# Altium PCB WeatherChannel.PcbDoc (part 1 of 2)
Units mil, origin at the board's own origin, x right, y up, seen from the top; angles counter-clockwise.
Board outline 4050 x 7300 mil, 2 copper layers (Top Layer, Bottom Layer); 129 components, 144 nets, 770 pads, 170 vias.
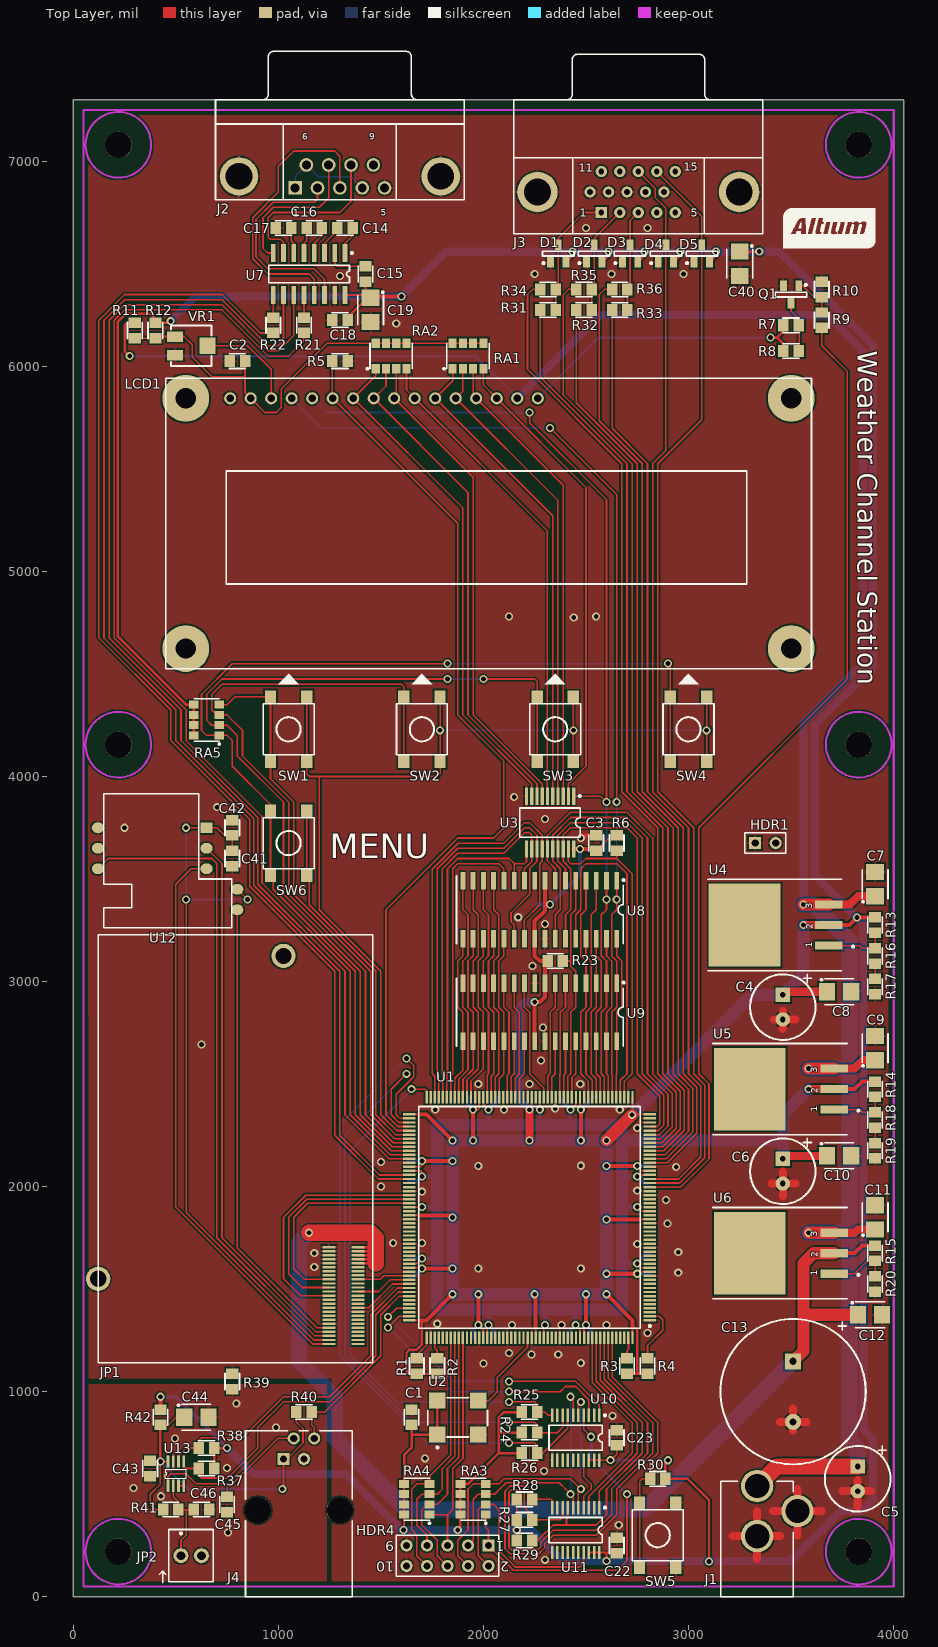
[diagram p0: Top Layer view]
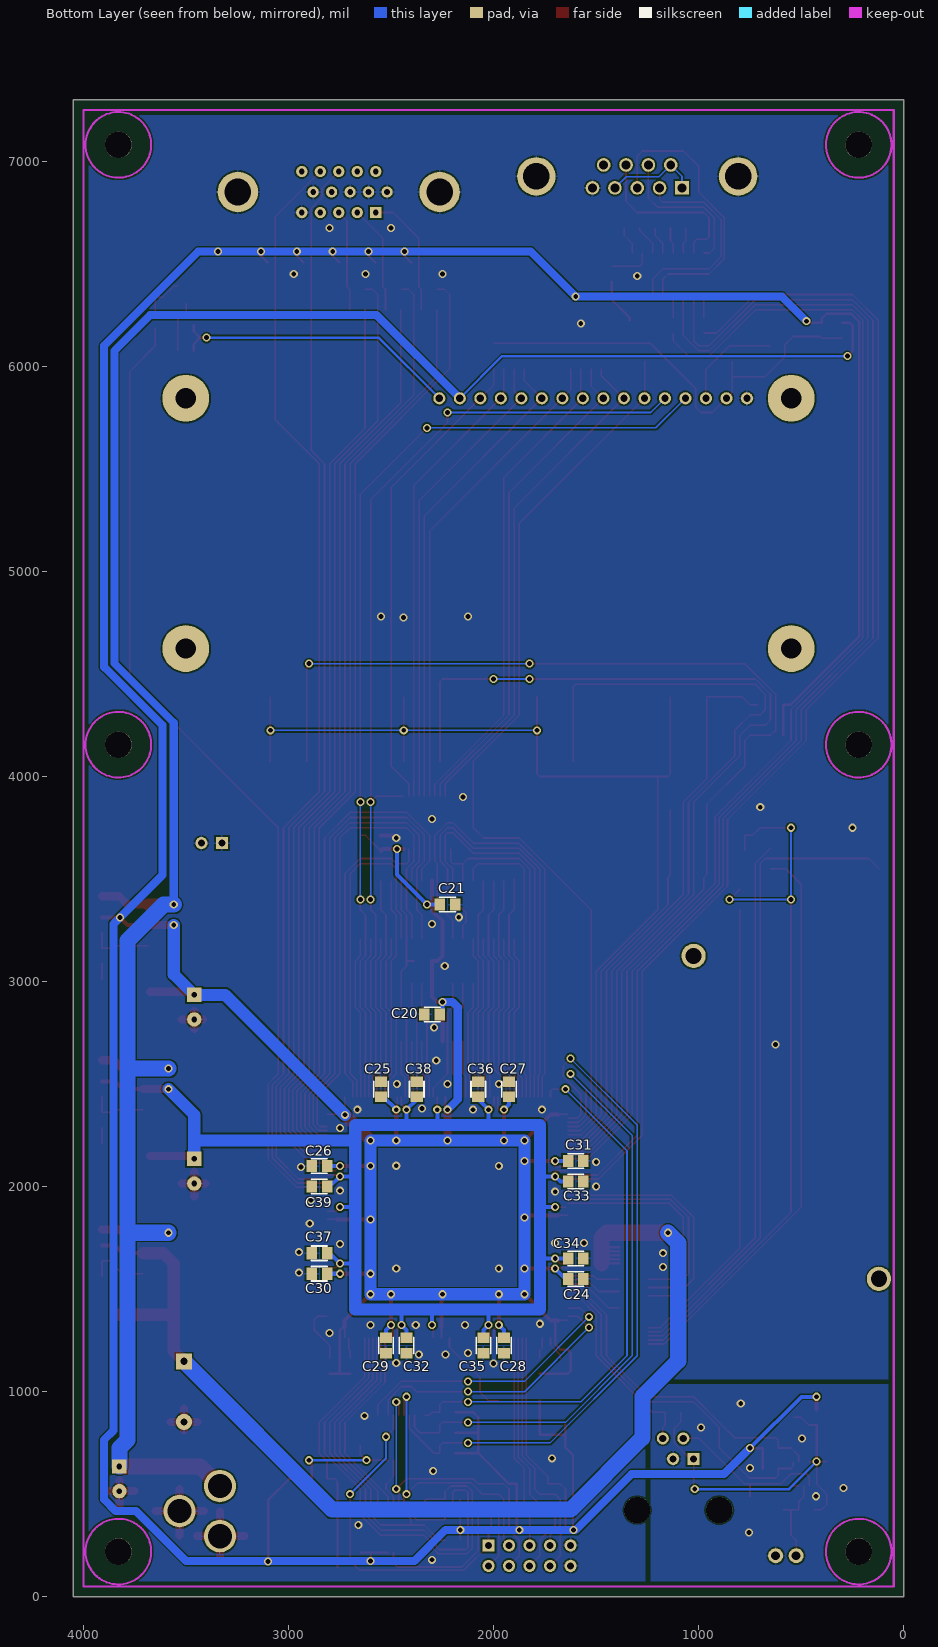
[diagram p1: Bottom Layer view, seen from below]

## Layer stack, top to bottom
Top Layer: signal copper 1.4
Dielectric: dielectric 12.6, FR-4, Dk 4.8
Bottom Layer: signal copper 1.4

## Board outline
0,0 4050,0 4050,7300 0,7300

## Design rules (kind name [scope] priority, off if disabled: settings)
Clearance [All] p1: gap=7.87
FabricationTestPointUsage TestPointUsage [All] p1: valid=0 allowmultiple=FALSE
FabricationTestpoint Testpoint [All] p1: side=3 testpointundercomponent=TRUE minsize=40 maxsize=100 preferedsize=60 minholesize=0 maxholesize=40 preferedholesize=32 testpointgrid=1 allowsidetop=TRUE allowsidebottom=TRUE usegrid=TRUE gridtolerance=0.01
HoleSize [All] p1: absolutevalues=TRUE maxlimit=157.48 minlimit=1 maxpercent=80.000 minpercent=20.000
PolygonConnect [All] p1: connectstyle=Relief reliefconductorwidth=10 reliefentries=4 polygonreliefangle="90 Angle"
RoomDefinition U_WC_MODEM [InComponentClass('U_WC_MODEM')] p1: confinementstyle=ConfineIn formatcopy=TRUE lockcomponents=FALSE outline 50,1050 1525,1050 1525,4050 50,4050
RoomDefinition FPGA_U1_Manual [InComponentClass('FPGA_U1_Manual')] p2: confinementstyle=ConfineIn formatcopy=TRUE lockcomponents=FALSE outline 1450,625 2900,625 2900,1325 1450,1325
RoomDefinition U_FPGA_U1_Auto [InComponentClass('U_FPGA_U1_Auto')] p3: confinementstyle=ConfineIn formatcopy=TRUE lockcomponents=FALSE outline 1580,1160 2860,1160 2860,2540 1580,2540
RoomDefinition U_WC_Boot [InComponentClass('U_WC_Boot')] p4: confinementstyle=ConfineIn formatcopy=TRUE lockcomponents=FALSE outline 1450,1025 1450,25 2850,25 2850,1025
RoomDefinition U_WC_KB [InComponentClass('U_WC_KB')] p5: confinementstyle=ConfineIn formatcopy=TRUE lockcomponents=FALSE outline 50,3450 3250,3450 3250,4455 50,4455
RoomDefinition U_WC_LCD [InComponentClass('U_WC_LCD')] p6: confinementstyle=ConfineIn formatcopy=TRUE lockcomponents=FALSE outline 100,3550 4100,3550 4100,6525 100,6525
RoomDefinition U_WC_PWR [InComponentClass('U_WC_PWR')] p7: confinementstyle=ConfineIn formatcopy=TRUE lockcomponents=FALSE outline 4125,-200 4125,3850 3085,3850 3085,-200
RoomDefinition U_WC_RS232 [InComponentClass('U_WC_RS232')] p8: confinementstyle=ConfineIn formatcopy=TRUE lockcomponents=FALSE outline 2025,7625 350,7625 350,6100 2025,6100
RoomDefinition U_WC_SENS [InComponentClass('U_WC_SENS')] p9: confinementstyle=ConfineIn formatcopy=TRUE lockcomponents=FALSE outline 325,-25 1425,-25 1425,1125 325,1125
RoomDefinition U_WC_SRAM [InComponentClass('U_WC_SRAM')] p10: confinementstyle=ConfineIn formatcopy=TRUE lockcomponents=FALSE outline 2850,2550 2850,3550 1750,3550 1750,2550
RoomDefinition U_WC_VGA [InComponentClass('U_WC_VGA')] p11: confinementstyle=ConfineIn formatcopy=TRUE lockcomponents=FALSE outline 3375,7575 2065,7575 2065,6150 3375,6150
RoutingVias [All] p1: holewidth=23.62 width=39.37 viastyle="Through Hole" minholewidth=23.62 minwidth=39.37 maxholewidth=23.62 maxwidth=39.37
SilkscreenOverComponentPads [All] p1: minsilkscreentomaskgap=10
SolderMaskExpansion [All] p1: expansion=4
Width Width_Power [(InNet('1V8') OR InNet('4V1') OR InNet('VCC') OR InNet('5V') OR InNet('GND'))] p1: maxlimit=98.43 minlimit=7.87 preferedwidth=7.87
Width [All] p2: maxlimit=11.81 minlimit=7.87 preferedwidth=7.87
24 further rules are at their usual default settings.

## Classes and differential pairs
component class U_WC_Boot: C22 C23 HDR4 R24 R25 R26 R27 R28 R29 RA3 RA4 U10 U11
component class U_FPGA_U1_Auto: U1
net class RED[1..0]: RED0 RED1
net class RAM_ADDR[16..0]: RAM_ADDR0 RAM_ADDR1 RAM_ADDR2 RAM_ADDR3 RAM_ADDR4 RAM_ADDR5 RAM_ADDR6 RAM_ADDR7 RAM_ADDR8 RAM_ADDR9 RAM_ADDR10 RAM_ADDR11 RAM_ADDR12 RAM_ADDR13 RAM_ADDR14 RAM_ADDR15 RAM_ADDR16
net class RAM1_DATA[7..0]: RAM1_DATA0 RAM1_DATA1 RAM1_DATA2 RAM1_DATA3 RAM1_DATA4 RAM1_DATA5 RAM1_DATA6 RAM1_DATA7
net class RAM0_DATA[7..0]: RAM0_DATA0 RAM0_DATA1 RAM0_DATA2 RAM0_DATA3 RAM0_DATA4 RAM0_DATA5 RAM0_DATA6 RAM0_DATA7
net class KP_ROW[3..0]: KP_ROW0 KP_ROW1 KP_ROW2 KP_ROW3
net class KP_COL[3..0]: KP_COL0 KP_COL1 KP_COL2 KP_COL3
net class GREEN[1..0]: GREEN0 GREEN1
net class BLUE[1..0]: BLUE0 BLUE1
component class U_WC_VGA: C40 D1 D2 D3 D4 D5 J3 R31 R32 R33 R34 R35 R36
component class U_WC_SRAM: C20 C21 R23 U8 U9
component class U_WC_SENS: C43 C44 C45 C46 J4 JP2 R37 R38 R39 R40 R41 R42 U13
component class U_WC_RS232: C14 C15 C16 C17 C18 C19 J2 R21 R22 U7
component class U_WC_PWR: C4 C5 C6 C7 C8 C9 C10 C11 C12 C13 HDR1 J1 R13 R14 R15 R16 R17 R18 R19 R20 U4 U5 U6
component class U_WC_MODEM: C41 C42 JP1 U12
component class U_WC_KB: RA5 SW1 SW2 SW3 SW4 SW6
component class FPGA_U1_Manual: C1 R1 R2 R3 R4 U2
component class U_WC_LCD: C2 C3 LCD1 Q1 R5 R6 R7 R8 R9 R10 R11 R12 RA1 RA2 U3 VR1

## Components (designator, comment, footprint, x,y, rotation, side; value= is the part's Value field where it differs from the comment)
C1 "0.1uF" CC2012-0805 1650,875 r90 top
C2 "0.1uF" CC2012-0805 800,6025 r180 top
C3 "0.1uF" CC2012-0805 2550,3675 r90 top
C4 "470uF 16V" RB8/3.5 3460,2875 r0 top
C5 "470uF 16V" RB8/3.5 3825,575 r0 top
C6 "470uF 16V" RB8/3.5 3460,2075 r0 top
C7 "10uF" MCCT-B 3910,3475 r90 top
C8 "10uF" MCCT-B 3735,2950 r0 top
C9 "10uF" MCCT-B 3910,2675 r90 top
C10 "10uF" MCCT-B 3735,2150 r0 top
C11 "10uF" MCCT-B 3910,1850 r90 top
C12 "10uF" MCCT-B 3885,1375 r0 top
C13 "10000uF 16V" RB18/7.5 3510,1000 r0 top
C14 "0.1uF" CC2012-0805 1325,6675 r180 top
C15 "0.1uF" CC2012-0805 1425,6450 r90 top
C16 "0.1uF" CC2012-0805 1175,6675 r180 top
C17 "0.1uF" CC2012-0805 1025,6675 r180 top
C18 "0.1uF" CC2012-0805 1300,6225 r180 top
C19 "10uF" MCCT-B 1450,6275 r270 top
C20 "0.1uF" CC2012-0805 2300,2840 r0 bottom
C21 "0.1uF" CC2012-0805 2225,3375 r180 bottom
C22 "0.1uF" CC2012-0805 2650,250 r270 top
C23 "0.1uF" CC2012-0805 2650,775 r270 top
C24 "0.1uF" CC2012-0805 1600,1550 r180 bottom
C25 "0.1uF" CC2012-0805 2550,2475 r90 bottom
C26 "0.1uF" CC2012-0805 2850,2100 r0 bottom
C27 "0.1uF" CC2012-0805 1925,2475 r90 bottom
C28 "0.1uF" CC2012-0805 1950,1225 r270 bottom
C29 "0.1uF" CC2012-0805 2525,1225 r270 bottom
C30 "0.1uF" CC2012-0805 2850,1575 r0 bottom
C31 "0.1uF" CC2012-0805 1600,2125 r180 bottom
C32 "0.1uF" CC2012-0805 2425,1225 r270 bottom
C33 "0.1uF" CC2012-0805 1600,2025 r180 bottom
C34 "0.1uF" CC2012-0805 1600,1650 r180 bottom
C35 "0.1uF" CC2012-0805 2050,1225 r270 bottom
C36 "0.1uF" CC2012-0805 2075,2475 r90 bottom
C37 "0.1uF" CC2012-0805 2850,1675 r0 bottom
C38 "0.1uF" CC2012-0805 2375,2475 r90 bottom
C39 "0.1uF" CC2012-0805 2850,2000 r0 bottom
C40 "10uF" MCCT-B 3250,6500 r270 top
C41 "0.1uF" CC2012-0805 775,3600 r270 top
C42 "0.1uF" CC2012-0805 775,3750 r90 top
C43 "0.1uF" CC2012-0805 375,625 r270 top
C44 "10uF" MCCT-B 600,875 r0 top
C45 "100pF" CC2012-0805 750,450 r270 top
C46 "100pF" CC2012-0805 625,425 r0 top
D1 "BAS40-04" SO-G3 2365,6550 r0 top
D2 "BAS40-04" SO-G3 2540,6550 r0 top
D3 "BAS40-04" SO-G3 2715,6550 r0 top
D4 "BAS40-04" SO-G3 2890,6550 r0 top
D5 "BAS40-04" SO-G3 3065,6550 r0 top
HDR1 "Header 2" HDR1X2 3325,3675 r0 top
HDR4 "Header 5X2" HDR2X5 2025,250 r180 top
J1 "PWR2.5" PWR2.5 3335,0 r90 top
J2 "DB9 Female" DSUB1.385-2H9 1300,7300 r0 top
J3 "Dsub-15-Female-HD" DB15-VGA-Female 2575,6750 r0 top
J4 "95009-2641" JACK1.27-2H4D 1100,0 r0 top
JP1 "Header 25X2" MC45 1025,3125 r180 top
JP2 "MHDR1X2" TS2.54x2 525,200 r90 top
LCD1 "162A" 162A 450,4525 r0 top
Q1 "2N7002" SO-G3 3500,6350 r180 top
R1 "4K7" CC2012-0805 1675,1125 r90 top
R2 "4K7" CC2012-0805 1775,1125 r90 top
R3 "4K7" CC2012-0805 2700,1125 r90 top
R4 "4K7" CC2012-0805 2800,1125 r90 top
R5 "4K7" CC2012-0805 1300,6025 r0 top
R6 "1K" CC2012-0805 2650,3675 r90 top
R7 "68R" CC2012-0805 3500,6200 r0 top
R8 "68R" CC2012-0805 3500,6075 r0 top
R9 "560R" CC2012-0805 3650,6225 r90 top
R10 "10K" CC2012-0805 3650,6375 r270 top
R11 "0R" CC2012-0805 300,6175 r270 top
R12 "0R" CC2012-0805 400,6175 r270 top
R13 "120R" CC2012-0805 3910,3275 r270 top
R14 "120R" CC2012-0805 3910,2475 r270 top
R15 "120R" CC2012-0805 3910,1675 r270 top
R16 "100R" CC2012-0805 3910,3125 r270 top
R17 "100R" CC2012-0805 3910,2975 r270 top
R18 "47R" CC2012-0805 3910,2325 r270 top
R19 "5R6" CC2012-0805 3910,2175 r270 top
R20 "270R" CC2012-0805 3910,1525 r270 top
R21 "100R" CC2012-0805 1125,6200 r90 top
R22 "100R" CC2012-0805 975,6200 r90 top
R23 "4K7" CC2012-0805 2350,3100 r0 top
R24 "4K7" CC2012-0805 2225,800 r0 top
R25 "4K7" CC2012-0805 2225,900 r0 top
R26 "4K7" CC2012-0805 2225,700 r0 top
R27 "4K7" CC2012-0805 2200,375 r0 top
R28 "4K7" CC2012-0805 2200,475 r0 top
R29 "4K7" CC2012-0805 2200,275 r0 top
R30 "4K7" CC2012-0805 2850,575 r180 top
R31 "680R" CC2012-0805 2315,6275 r0 top
R32 "680R" CC2012-0805 2490,6275 r0 top
R33 "680R" CC2012-0805 2665,6275 r0 top
R34 "330R" CC2012-0805 2315,6375 r0 top
R35 "330R" CC2012-0805 2490,6375 r0 top
R36 "330R" CC2012-0805 2665,6375 r0 top
R37 "4K7" CC2012-0805 650,625 r180 top
R38 "4K7" CC2012-0805 650,725 r180 top
R39 "0R" CC2012-0805 775,1050 r270 top
R40 "2K7" CC2012-0805 1125,900 r0 top
R41 "2K7" CC2012-0805 475,425 r0 top
R42 "4R7" CC2012-0805 425,875 r270 top
RA1 "4K7" MNR34 1925,6050 r90 top
RA2 "4K7" MNR34 1550,6050 r90 top
RA3 "4K7" MNR34 1950,475 r180 top
RA4 "4K7" MNR34 1675,475 r180 top
RA5 "4K7" MNR34 650,4275 r180 top
SW1 "B3FS" B3FS_SWITCH 1050,4230 r90 top
SW2 "B3FS" B3FS_SWITCH 1700,4230 r90 top
SW3 "B3FS" B3FS_SWITCH 2350,4230 r90 top
SW4 "B3FS" B3FS_SWITCH 3000,4230 r90 top
SW5 "B3FS" B3FS_SWITCH 2850,300 r270 top
SW6 "B3FS" B3FS_SWITCH 1050,3675 r90 top
U1 "XC2S300E-6PQ208C" PQ208 2225,1850 r180 top
U2 "QSMO_4200" QSMO_4200 1775,775 r0 top
U3 "74LVC245A" SSO-G20/P.65 2325,3775 r180 top
U4 "LM1084IS-ADJ" TO-263 3685,3175 r90 top
U5 "LM1084IS-ADJ" TO-263 3710,2375 r90 top
U6 "LM1084IS-ADJ" TO-263 3710,1575 r90 top
U7 "MAX3232EUE" SO-G16 1150,6450 r180 top
U8 "IDT71V124SA15Y" SO-J32 2275,3350 r180 top
U9 "IDT71V124SA15Y" SO-J32 2275,2850 r180 top
U10 "XCF01SVO20C" VO20 2450,775 r180 top
U11 "XCF01SVO20C" VO20 2450,325 r180 top
U12 "CCM03_CARD_SOCKET" CCM03_MKIII 650,3750 r0 top
U13 "MAX1037" SOT23_8 500,600 r90 top
VR1 "20K" POT4MM-2 575,6100 r0 top
? "" AltiumLogo48mm 3457.86,6575 r0 top

## Footprints (in the part's own frame and the unit in brackets; to place one, negate y for a bottom-side part, rotate by r counter-clockwise, add the part's x,y. Pads: shape width x height; smd on the part's side, far side on the other; paste and mask are expansions set on the pad)
162A [mm]
  round 1.5 hole 0.9: 1(8.001,33.503) 2(10.541,33.503) 3(13.081,33.503) 4(15.621,33.503) 5(18.161,33.503) 6(20.701,33.503) 7(23.241,33.503) 8(25.781,33.503) 9(28.321,33.503) 10(30.861,33.503) 11(33.401,33.503) 12(35.941,33.503) 13(38.481,33.503) 14(41.021,33.503) 15(43.561,33.503) 16(46.101,33.503)
  round 5.8 hole 2.5 unplated: M1(2.501,33.503) M2(77.501,33.503) M3(2.501,2.503) M4(77.501,2.503)
  silkscreen extent 0,0 80,36
AltiumLogo48mm [mil]
  silkscreen extent 4,4 452,196
B3FS_SWITCH [mm]
  rect 1.6x1.4 smd: 1(4.01,-2.25) 2(-4,-2.25) 3(4.01,2.24) 4(-4,2.24)
  silkscreen extent -3.16,-3.16 3.15,3.15
CC2012-0805 [mm]
  rect 1.3x1.5 smd: 1(-0.95,0) 2(0.95,0)
  silkscreen extent -1,-0.9 1,0.9
CCM03_MKIII [mm] "SIM/SAM card connector with card detection switch"
  rect 1.5x1.3 smd: 1(0,0)
  oval 1.5x1.3 smd: 2(0,-2.54) 3(0,-5.08) 4(-13.45,0) 5(-13.45,-2.54) 6(-13.45,-5.08) 7(3.8,-7.62) 8(3.8,-10.16)
  silkscreen extent -12.75,-12.4 3.1,4.2
DB15-VGA-Female [mm]
  rect 1.4x1.4 hole 0.7: 1(0,0)
  round 1.4 hole 0.7: 2(2.29,0) 3(4.58,0) 4(6.87,0) 5(9.16,0) 6(-1.4,2.54) 7(0.89,2.54) 8(3.18,2.54) 9(5.47,2.54) 10(7.76,2.54) 11(0,5.08) 12(2.29,5.08) 13(4.58,5.08) 14(6.87,5.08) 15(9.16,5.08)
  round 5 hole 3.3: 16(-7.915,2.54) 17(17.075,2.54)
  silkscreen extent -10.83,-2.65 20.01,19.61
DSUB1.385-2H9 [mm]
  rect 1.69x1.69 hole 1.1: 1(-5.54,-10.92)
  round 1.69 hole 1.1: 2(-2.77,-10.92) 3(0,-10.92) 4(2.77,-10.92) 5(5.54,-10.92) 6(-4.155,-8.08) 7(-1.385,-8.08) 8(1.385,-8.08) 9(4.155,-8.08)
  round 4.76 hole 3.3: 10(-12.495,-9.5) 11(12.495,-9.5)
  silkscreen extent -15.4,-12.4 15.4,6
HDR1X2 [mm]
  rect 1.5x1.5 hole 0.9: 1(0,0)
  round 1.5 hole 0.9: 2(2.54,0)
  silkscreen extent -1.27,-1.27 3.81,1.27
HDR2X5 [mm]
  rect 1.5x1.5 hole 0.9: 1(0,0)
  round 1.5 hole 0.9: 2(0,2.54) 3(2.54,0) 4(2.54,2.54) 5(5.08,0) 6(5.08,2.54) 7(7.62,0) 8(7.62,2.54) 9(10.16,0) 10(10.16,2.54)
  silkscreen extent -1.27,-1.27 11.43,3.81
JACK1.27-2H4D [mm] "Connector; PCB Jack, Thru-Hole; 1-Port, 6 Positions, 4 Loaded; Unshielded without Lightpipes; Right Angle"
  rect 1.5x1.5 hole 0.9: 1(-1.905,17.07)
  round 1.5 hole 0.9: 2(-0.635,19.61) 3(0.635,17.07) 4(1.905,19.61)
  round 3.25 hole 3.25: MH1(-5.08,10.72) MH2(5.08,10.72)
  silkscreen extent -6.6,0 6.61,20.57
MC45 [mm]
  round 3 hole 2: 0(0,0) 0(22.95,40)
  rect 1.6x0.3 smd: 1(-5.625,48.075) 2(-5.625,47.575) 3(-5.625,47.075) 4(-5.625,46.575) 5(-5.625,46.075) 6(-5.625,45.575) 7(-5.625,45.075) 8(-5.625,44.575) 9(-5.625,44.075) 10(-5.625,43.575) 11(-5.625,43.075) 12(-5.625,42.575) 13(-5.625,42.075) 14(-5.625,41.575) 15(-5.625,41.075) 16(-5.625,40.575) 17(-5.625,40.075) 18(-5.625,39.575) 19(-5.625,39.075) 20(-5.625,38.575) 21(-5.625,38.075) 22(-5.625,37.575) 23(-5.625,37.075) 24(-5.625,36.575) 25(-5.625,36.075) 26(-9.225,36.075) 27(-9.225,36.575) 28(-9.225,37.075) 29(-9.225,37.575) 30(-9.225,38.075) 31(-9.225,38.575) 32(-9.225,39.075) 33(-9.225,39.575) 34(-9.225,40.075) 35(-9.225,40.575) 36(-9.225,41.075) 37(-9.225,41.575) 38(-9.225,42.075) 39(-9.225,42.575) 40(-9.225,43.075) 41(-9.225,43.575) 42(-9.225,44.075) 43(-9.225,44.575) 44(-9.225,45.075) 45(-9.225,45.575) 46(-9.225,46.075) 47(-9.225,46.575) 48(-9.225,47.075) 49(-9.225,47.575) 50(-9.225,48.075)
  silkscreen extent -11.05,-2.62 22.95,50.4
MCCT-B [mm]
  rect 2x2.2 smd: 1(-1.5,0) 2(1.5,0)
  silkscreen extent -2.3,-1.6 1.8,1.6
MNR34 [mm]
  rect 1.2x1 smd: 1(-1.575,1.905) 2(-1.575,0.635) 3(-1.575,-0.635) 4(-1.575,-1.905) 5(1.575,-1.905) 6(1.575,-0.635) 7(1.575,0.635) 8(1.575,1.905)
  silkscreen extent -1.67,-2.62 1.55,3.07
POT4MM-2 [mm]
  rect 2x1.3 smd: CCW(-2,-1.15) CW(-2,1.15)
  rect 2x2 smd: W(2,0)
  silkscreen extent -2.5,-2.5 2.5,2.5
PQ208 [mm] "208-Pin Plastic Quad Flat Pack (PQ208)"
  rect 1.55x0.3 smd: 1(-14.9,12.75) 2(-14.9,12.25) 3(-14.9,11.75) 4(-14.9,11.25) 5(-14.9,10.75) 6(-14.9,10.25) 7(-14.9,9.75) 8(-14.9,9.25) 9(-14.9,8.75) 10(-14.9,8.25) 11(-14.9,7.75) 12(-14.9,7.25) 13(-14.9,6.75) 14(-14.9,6.25) 15(-14.9,5.75) 16(-14.9,5.25) 17(-14.9,4.75) 18(-14.9,4.25) 19(-14.9,3.75) 20(-14.9,3.25) 21(-14.9,2.75) 22(-14.9,2.25) 23(-14.9,1.75) 24(-14.9,1.25) 25(-14.9,0.75) 26(-14.9,0.25) 27(-14.9,-0.25) 28(-14.9,-0.75) 29(-14.9,-1.25) 30(-14.9,-1.75) 31(-14.9,-2.25) 32(-14.9,-2.75) 33(-14.9,-3.25) 34(-14.9,-3.75) 35(-14.9,-4.25) 36(-14.9,-4.75) 37(-14.9,-5.25) 38(-14.9,-5.75) 39(-14.9,-6.25) 40(-14.9,-6.75) 41(-14.9,-7.25) 42(-14.9,-7.75) 43(-14.9,-8.25) 44(-14.9,-8.75) 45(-14.9,-9.25) 46(-14.9,-9.75) 47(-14.9,-10.25) 48(-14.9,-10.75) 49(-14.9,-11.25) 50(-14.9,-11.75) 51(-14.9,-12.25) 52(-14.9,-12.75) 105(14.9,-12.75) 106(14.9,-12.25) 107(14.9,-11.75) 108(14.9,-11.25) 109(14.9,-10.75) 110(14.9,-10.25) 111(14.9,-9.75) 112(14.9,-9.25) 113(14.9,-8.75) 114(14.9,-8.25) 115(14.9,-7.75) 116(14.9,-7.25) 117(14.9,-6.75) 118(14.9,-6.25) 119(14.9,-5.75) 120(14.9,-5.25) 121(14.9,-4.75) 122(14.9,-4.25) 123(14.9,-3.75) 124(14.9,-3.25) 125(14.9,-2.75) 126(14.9,-2.25) 127(14.9,-1.75) 128(14.9,-1.25) 129(14.9,-0.75) 130(14.9,-0.25) 131(14.9,0.25) 132(14.9,0.75) 133(14.9,1.25) 134(14.9,1.75) 135(14.9,2.25) 136(14.9,2.75) 137(14.9,3.25) 138(14.9,3.75) 139(14.9,4.25) 140(14.9,4.75) 141(14.9,5.25) 142(14.9,5.75) 143(14.9,6.25) 144(14.9,6.75) 145(14.9,7.25) 146(14.9,7.75) 147(14.9,8.25) 148(14.9,8.75) 149(14.9,9.25) 150(14.9,9.75) 151(14.9,10.25) 152(14.9,10.75) 153(14.9,11.25) 154(14.9,11.75) 155(14.9,12.25) 156(14.9,12.75)
  rect 0.3x1.55 smd: 53(-12.75,-14.9) 54(-12.25,-14.9) 55(-11.75,-14.9) 56(-11.25,-14.9) 57(-10.75,-14.9) 58(-10.25,-14.9) 59(-9.75,-14.9) 60(-9.25,-14.9) 61(-8.75,-14.9) 62(-8.25,-14.9) 63(-7.75,-14.9) 64(-7.25,-14.9) 65(-6.75,-14.9) 66(-6.25,-14.9) 67(-5.75,-14.9) 68(-5.25,-14.9) 69(-4.75,-14.9) 70(-4.25,-14.9) 71(-3.75,-14.9) 72(-3.25,-14.9) 73(-2.75,-14.9) 74(-2.25,-14.9) 75(-1.75,-14.9) 76(-1.25,-14.9) 77(-0.75,-14.9) 78(-0.25,-14.9) 79(0.25,-14.9) 80(0.75,-14.9) 81(1.25,-14.9) 82(1.75,-14.9) 83(2.25,-14.9) 84(2.75,-14.9) 85(3.25,-14.9) 86(3.75,-14.9) 87(4.25,-14.9) 88(4.75,-14.9) 89(5.25,-14.9) 90(5.75,-14.9) 91(6.25,-14.9) 92(6.75,-14.9) 93(7.25,-14.9) 94(7.75,-14.9) 95(8.25,-14.9) 96(8.75,-14.9) 97(9.25,-14.9) 98(9.75,-14.9) 99(10.25,-14.9) 100(10.75,-14.9) 101(11.25,-14.9) 102(11.75,-14.9) 103(12.25,-14.9) 104(12.75,-14.9) 157(12.75,14.9) 158(12.25,14.9) 159(11.75,14.9) 160(11.25,14.9) 161(10.75,14.9) 162(10.25,14.9) 163(9.75,14.9) 164(9.25,14.9) 165(8.75,14.9) 166(8.25,14.9) 167(7.75,14.9) 168(7.25,14.9) 169(6.75,14.9) 170(6.25,14.9) 171(5.75,14.9) 172(5.25,14.9) 173(4.75,14.9) 174(4.25,14.9) 175(3.75,14.9) 176(3.25,14.9) 177(2.75,14.9) 178(2.25,14.9) 179(1.75,14.9) 180(1.25,14.9) 181(0.75,14.9) 182(0.25,14.9) 183(-0.25,14.9) 184(-0.75,14.9) 185(-1.25,14.9) 186(-1.75,14.9) 187(-2.25,14.9) 188(-2.75,14.9) 189(-3.25,14.9) 190(-3.75,14.9) 191(-4.25,14.9) 192(-4.75,14.9) 193(-5.25,14.9) 194(-5.75,14.9) 195(-6.25,14.9) 196(-6.75,14.9) 197(-7.25,14.9) 198(-7.75,14.9) 199(-8.25,14.9) 200(-8.75,14.9) 201(-9.25,14.9) 202(-9.75,14.9) 203(-10.25,14.9) 204(-10.75,14.9) 205(-11.25,14.9) 206(-11.75,14.9) 207(-12.25,14.9) 208(-12.75,14.9)
  silkscreen extent -15.03,-13.72 13.72,13.72
PWR2.5 [mm]
  round 4 hole 3: 1(13.7,0) 2(10.6,-5) 3(7.5,0)
  silkscreen extent 0,-4.48 14.3,4.5
QSMO_4200 [mm]
  rect 2x2 smd: 1(0,0.4) 2(5.08,0.4) 3(5.08,4.6) 4(0,4.6)
  silkscreen extent -1.19,-1.31 6.22,4.95
RB8/3.5 [mil]
  rect 70x70 hole 27.56: 1(0,60)
  round 70 hole 27.56: 2(0,-60)
  silkscreen extent -160,-160 160,160
RB18/7.5 [mm]
  rect 2x2 hole 0.9: 1(0,3.75)
  round 2 hole 0.9: 2(0,-3.75)
  silkscreen extent -9,-9 9,9
SO-G3 [mm]
  rect 0.85x1.3 smd: 1(-0.95,-1.1) 2(0.95,-1.1) 3(0,1.1)
  silkscreen extent -1.95,-1.32 1.95,0.3
SO-G16 [mm]
  rect 0.6x2.2 smd: 1(-4.445,-2.6) 2(-3.175,-2.6) 3(-1.905,-2.6) 4(-0.635,-2.6) 5(0.635,-2.6) 6(1.905,-2.6) 7(3.175,-2.6) 8(4.445,-2.6) 9(4.445,2.6) 10(3.175,2.6) 11(1.905,2.6) 12(0.635,2.6) 13(-0.635,2.6) 14(-1.905,2.6) 15(-3.175,2.6) 16(-4.445,2.6)
  silkscreen extent -5.42,-2.72 5,1.1
SO-J32 [mm]
  rect 0.6x2.2 smd: 1(-9.525,-3.6) 2(-8.255,-3.6) 3(-6.985,-3.6) 4(-5.715,-3.6) 5(-4.445,-3.6) 6(-3.175,-3.6) 7(-1.905,-3.6) 8(-0.635,-3.6) 9(0.635,-3.6) 10(1.905,-3.6) 11(3.175,-3.6) 12(4.445,-3.6) 13(5.715,-3.6) 14(6.985,-3.6) 15(8.255,-3.6) 16(9.525,-3.6) 17(9.525,3.6) 18(8.255,3.6) 19(6.985,3.6) 20(5.715,3.6) 21(4.445,3.6) 22(3.175,3.6) 23(1.905,3.6) 24(0.635,3.6) 25(-0.635,3.6) 26(-1.905,3.6) 27(-3.175,3.6) 28(-4.445,3.6) 29(-5.715,3.6) 30(-6.985,3.6) 31(-8.255,3.6) 32(-9.525,3.6)
  silkscreen extent -10.5,-4.19 10.32,4.19
SOT23_8 [mm]
  rect 1.5x0.35 smd: 1(-1.5,0.975) 2(-1.5,0.325) 3(-1.5,-0.325) 4(-1.5,-0.975) 5(1.5,-0.975) 6(1.5,-0.325) 7(1.5,0.325) 8(1.5,0.975)
  silkscreen extent -0.55,-1.3 0.55,1.3
SSO-G20/P.65 [mm]
  rect 0.4x2.15 smd: 1(-2.925,-3.275) 2(-2.275,-3.275) 3(-1.625,-3.275) 4(-0.975,-3.275) 5(-0.325,-3.275) 6(0.325,-3.275) 7(0.975,-3.275) 8(1.625,-3.275) 9(2.275,-3.275) 10(2.925,-3.275) 11(2.925,3.275) 12(2.275,3.275) 13(1.625,3.275) 14(0.975,3.275) 15(0.325,3.275) 16(-0.325,3.275) 17(-0.975,3.275) 18(-1.625,3.275) 19(-2.275,3.275) 20(-2.925,3.275)
  silkscreen extent -3.8,-3.4 3.75,1.8
TO-263 [mm]
  rect 1x3.4 smd: 1(0,0) 2(2.54,0) 3(5.08,0)
  rect 10.25x8.9 smd: 4(2.54,10.45)
  silkscreen extent -3.1,-3.13 8.2,15
TS2.54x2 [mm]
  round 1.85 hole 1.1: 1(0,0) 2(0,-2.54)
  silkscreen extent -3.35,-4 3.25,2.65
VO20 [mm]
  rect 0.3x1.65 smd: 1(-2.925,-2.775) 2(-2.275,-2.775) 3(-1.625,-2.775) 4(-0.975,-2.775) 5(-0.325,-2.775) 6(0.325,-2.775) 7(0.975,-2.775) 8(1.625,-2.775) 9(2.275,-2.775) 10(2.925,-2.775) 11(2.925,2.775) 12(2.275,2.775) 13(1.625,2.775) 14(0.975,2.775) 15(0.325,2.775) 16(-0.325,2.775) 17(-0.975,2.775) 18(-1.625,2.775) 19(-2.275,2.775) 20(-2.925,2.775)
  silkscreen extent -3.75,-2.9 3.3,1.55

## Part data
C1 C2 C3 C14 C15 C16 C17 C18 C20 C21 C22 C23 C24 C25 C26 C27 C28 C29 C30 C31 C32 C33 C34 C35 C36 C37 C38 C39 C41 C42 C43 C45 C46: library part CAP, "Capacitor"
C4 C5 C6 C7 C8 C9 C10 C11 C12 C13 C19 C40 C44: library part CAP_POLAR, "Polar Capacitor"
D1 D2 D3 D4 D5: "Shottky Diode Pair"
HDR1 JP2: "Header, 2-Pin"
HDR4: "Header, 5-Pin, Dual row"
J1: "Low Voltage Power Supply Sonnector"
J2: library part "D Connector 9", "Receptacle Assembly, 9 Position, Right Angle"
J3: "Dsub-15 High density VGA Female connetor"
J4: "Right Angle, Standard Profile, with Mounting Rib, Flush Mount PCB Jack"
JP1: "Header, 25-Pin, Dual row"
LCD1: "16 char * 2 line LCD character display with b/light"
Q1: "N Channel Mosfet"
R1 R2 R3 R4 R5 R6 R7 R8 R9 R10 R11 R12 R13 R14 R15 R16 R17 R18 R19 R20 R21 R22 R23 R24 R25 R26 R27 R28 R29 R30 R31 R32 R33 R34 R35 R36 R37 R38 R39 R40 R41 R42: library part RES, "Resistor"
RA1 RA2 RA3 RA4 RA5: library part MNR34, "3216x4 Resistor Array"
SW1 SW2 SW3 SW4 SW5 SW6: "SPNA SMD Keyboard Switch"
U1: "Spartan-IIE 1.8V FPGA, 208-Pin PQFP, Standard Performance, Commercial Grade"
U2: "Surface Mount Crystal Oscillator"
U3: "Octal Bus Transceiver with 3-State Outputs"
U4 U5 U6: "5A Low Dropout Possitive Regulators"
U7: "3.0V TO 5.5V, Low-Power, up to 1Mbps, True RS-232 Transceiver Using Four 0.1µF External Capacitor"
U8 U9: "128K x 8 bit Fast Static RAM"
U10 U11: "XCF00S Series, Platform Flash In-System Programmable Configuration 3.3V PROM, 1-Megabit, Commercial Grade"
U12: "SIM/SAM card connector with card detection switch"
U13: "4 Channel 8 Bit ADC, I2C interface, 2.7V to 3.6V Supply"
VR1: library part POT_M, "Potentiometer"

## Free pads (board coordinates)
  round 129.92 hole 129.92: MH1(3830,220) MH2(3830,4155) MH3(3830,7080) MH4(220,7080) MH5(220,4155) MH6(220,220)

## Via types
v1: diameter 39.37, hole 23.62, Top Layer to Bottom Layer, 170 vias

## Nets (pads, with @x,y where several pads share a name; then routed paths per layer and width w, separated by ;. In a path a pad name is that pad's centre, name@x,y a point inside that pad or via, vN(x,y) a via of type N, cw(c..) or ccw(c..) an arc to the next point about the centre after c; other vN are vias at no path point)
1V8: C6.1 C10.1 C32.1 C33.1 C34.1 C35.1 C36.1 C37.1 C38.1 C39.1 R14.1 U1.14 U1.28 U1.37 U1.67 U1.76 U1.90 U1.119 U1.128 U1.142 U1.172 U1.186 U1.195 U5.2 | length 7674.6
  Top Layer w7.87: U1.142@1638.39,1623.62 1673.62,1623.62 v1(1700,1650) ; U1.119@1638.39,2076.38 1698.62,2076.38 1700,2075 v1(1700,2050) ; U1.128@1650,1900 v1(1700,1900) ; U1.90@1998.62,2436.61 1998.62,2401.38 v1(2025,2375) ; U1.172@2018.31,1263.39 2018.31,1318.31 v1(2025,1325) ; U1.76@2274.21,2436.61 2274.21,2375.79 v1(2275,2375) ; U1.186@2293.9,1263.39 2293.9,1318.9 v1(2300,1325) ; v1(2425,2375) 2451.38,2401.38 U1.67@2451.38,2436.61 ; v1(2450,1325) 2471.06,1303.94 U1.195@2471.06,1263.39 ; v1(2750,1625) 2771.06,1603.94 U1.14@2811.61,1603.94 ; v1(2750,1900) 2770.47,1879.53 U1.28@2811.61,1879.53 ; v1(2750,2050) 2756.69,2056.69 U1.37@2811.61,2056.69
  Top Layer w19.68: U5.2@3710,2475 3810,2475 3847.4,2512.4 R14.1@3910,2512.4
  Top Layer w39.37: C6.1@3460,2135 3475,2150 C10.1@3675.95,2150 ; v1(3585,2475) U5.2@3710,2475
  Bottom Layer w19.68: C34.1@1637.4,1650 v1(1700,1650) 1775,1650 ; C33.1@1637.4,2025 1675,2025 v1(1700,2050) 1775,2050 ; v1(1700,1900) 1775,1900 ; 2025,1400 v1(2025,1325) 2050,1300 C35.1@2050,1262.4 ; 2025,2300 v1(2025,2375) 2075,2425 C36.1@2075,2437.6 ; 2275,2300 v1(2275,2375) ; v1(2300,1325) 2300,1400 ; C38.1@2375,2437.6 2375,2425 v1(2425,2375) 2425,2300 ; C32.1@2425,1262.4 2425,1300 v1(2450,1325) 2450,1400 ; 2675,1625 v1(2750,1625) 2800,1675 C37.1@2812.6,1675 ; 2675,1900 v1(2750,1900) ; 2675,2050 v1(2750,2050) 2800,2000 C39.1@2812.6,2000
  Bottom Layer w59.06: 2675,2225 3460,2225 ; C6.1@3460,2135 3460,2350 v1(3585,2475) ; 1775,1400 2675,1400 2675,2300 1775,2300 1775,1400
4V1: C12.1 C13.1 JP1.26 JP1.27 JP1.28 JP1.29 JP1.30 R15.1 U6.2 | length 5787.4
  Top Layer w11.81: JP1.30@1388.19,1625.98 1474.02,1625.98 ; JP1.29@1388.19,1645.67 1470.67,1645.67 ; JP1.28@1388.19,1665.35 1465.35,1665.35 ; JP1.27@1388.19,1685.04 1464.96,1685.04 ; JP1.26@1388.19,1704.72 1470.28,1704.72
  Top Layer w19.68: U6.2@3710,1675 3810,1675 3847.4,1712.4 R15.1@3910,1712.4
  Top Layer w59.06: C13.1@3510,1147.64 3560,1197.64 3560,1625 3610,1675 U6.2@3710,1675 ; 3560,1375 C12.1@3825.95,1375
  Top Layer w78.74: v1(1150,1775) 1450,1775 1475,1750 1475,1625
  Bottom Layer w78.74: v1(1150,1775) 1100,1725 1100,1150 1275,975 1275,775 1625,425 2787.36,425 C13.1@3510,1147.64
5V: C5.1 C7.1 C9.1 C11.1 J1.1 LCD1.15 R11.1 U4.3 U5.3 U6.3 | length 11787.8
  Top Layer w11.81: v1(275,6050) 250,6075 250,6200 262.4,6212.4 R11.1@300,6212.4
  Top Layer w39.37: U4.3@3685,3375 3785,3375 ; U6.3@3710,1775 3810,1775 3825.95,1790.95 C11.1@3910,1790.95 ; U5.3@3710,2575 3810,2575 3850.95,2615.95 C9.1@3910,2615.95 ; 3787,3375 3785,3375 ; C7.1@3910,3415.95 3825.95,3415.95 3785,3375
  Top Layer w59.06: v1(3560,3375) U4.3@3685,3375 ; v1(3585,1775) U6.3@3710,1775 ; v1(3585,2575) U5.3@3710,2575
  Top Layer w78.74: J1.1@3335,539.37 3430.63,635 C5.1@3825,635
  Bottom Layer w11.81: v1(275,6050) 1959,6050 LCD1.15@2165,5844
  Bottom Layer w39.37: LCD1.15@2165,5844 2571,6250 3675,6250 3850,6075 3850,4551.86 3560,4261.86 v1(3560,3375)
  Bottom Layer w78.74: v1(3560,3375) 3610,3375 3785,3200 3785,765 3825,725 C5.1@3825,635 ; v1(3585,1775) 3785,1775 ; v1(3585,2575) 3785,2575
AGND: C43.2 C44.2 C45.2 C46.2 J4.3 JP2.2 R39.2 U13.7 | length 22
  Top Layer w7.87: v1(495.66,770.74) v1@495.66,775 ; J4.3@1125,672.05 J4.3@1127.95,675
  Bottom Layer w7.87: v1@750,625 v1(750,627.95) ; v1(989.36,825) v1@1000,825
  other v1: 755,313.77 428.34,490 293.7,530 795,942.12
AIN0: C45.1 J4.2 U13.1 | length 839.9
  Top Layer w7.87: U13.1@461.61,540.95 461.61,586.61 475,600 550,600 600,550 775,550 997.05,772.05 J4.2@1075,772.05 ; C45.1@750,487.4 750,550
AIN1: C46.1 JP2.1 R41.2 U13.2 | length 436.9
  Top Layer w7.87: U13.2@487.2,540.95 487.2,487.8 512.4,462.6 R41.2@512.4,425 C46.1@587.6,425 ; JP2.1@525,200 525,275 550,300 550,425
BLUE0: R33.1 U1.40 | length 4474
  Top Layer w7.87: R33.1@2627.6,6275 2627.6,5697.4 2800,5525 2800,5125 2800,3925 2975,3750 2975,2550 3040,2485 3040,2260 2895.75,2115.75 U1.40@2811.61,2115.75
BLUE1: R36.1 U1.41 | length 4608.5
  Top Layer w7.87: R36.1@2627.6,6375 2590,6375 2565,6350 2565,5735 2775,5525 2775,5125 2775,3925 2950,3750 2950,2550 3020,2480 3020,2265 2890.43,2135.43 U1.41@2811.61,2135.43
CCLK: U1.155 U10.3 | length 1347.5
  Top Layer w7.87: v1(1535.43,1313.51) 1589.64,1367.72 U1.155@1638.39,1367.72 ; v1(2125,1000) 2375,1000 2400,1025 2450,1025 2513.98,961.02 U10.3@2513.98,884.25
  Bottom Layer w7.87: v1(1535.43,1313.51) 1848.93,1000 v1(2125,1000)
CCLK_PR: U1.198 U11.3 | length 997.3
  Top Layer w7.87: U11.3@2513.98,434.25 2513.98,488.98 2725,700 2725,850 2530.12,1044.88 U1.198@2530.12,1263.39
CLK_BRD: U1.182 U2.3 | length 436.2
  Top Layer w7.87: U2.3@1975,956.1 2025.19,956.1 2066.53,997.44 2066.53,1067.64 2215.16,1216.27 U1.182@2215.16,1263.39
CTS: J2.7 U7.8 | length 730.8
  Top Layer w7.87: U7.8@975,6552.36 947.64,6552.36 925,6575 925,6725 975,6775 1200,6775 1245.47,6820.47 J2.7@1245.47,6981.89
DIN: U1.153 U10.1 | length 1379.7
  Top Layer w7.87: v1(1535,1365) 1577.09,1407.09 U1.153@1638.39,1407.09 ; v1(2125,1050) 2450,1050 2565.16,934.84 U10.1@2565.16,884.25
  Bottom Layer w7.87: v1(1535,1365) 1850,1050 v1(2125,1050)
DIN_PR: U1.199 U11.1 | length 988.6
  Top Layer w7.87: U1.199@2549.8,1263.39 2549.8,1050.2 2750,850 2750,700 2565.16,515.16 U11.1@2565.16,434.25
DONE: R25.2 U1.104 U10.10 | length 2658.3
  Top Layer w7.87: v1(1650,2475) 1715,2475 1723.03,2466.97 U1.104@1723.03,2436.61 ; v1(2125,950) 2150,950 2250,950 2262.4,937.6 R25.2@2262.4,900 2300,900 2315.75,884.25 U10.10@2334.84,884.25
  Bottom Layer w7.87: v1(1650,2475) 1350,2175 1350,1175 1575,950 v1(2125,950)
DONE_PR: R28.2 U1.202 U11.10 | length 2278.2
  Top Layer w7.87: U11.10@2334.84,434.25 2334.84,470.16 2330,475 R28.2@2237.4,475 2237.4,512.6 2210,540 2130,540 2105,515 2105,235 2130,210 2270,210 2300,240 2300,260 2340,300 2550,300 2650,400 2650,525 2825,700 2825,850 2608.86,1066.14 U1.202@2608.86,1263.39
GND: C1.2 C2.2 C3.2 C4.2 C5.2 C6.2 C7.2 C8.2 C9.2 C10.2 C11.2 C12.2 C13.2 C17.2 C18.2 C19.2 C20.2 C21.2 C22.1 C23.1 C24.2 C25.2 C26.2 C27.2 C28.2 C29.2 C30.2 C31.2 C32.2 C33.2 C34.2 C35.2 C36.2 C37.2 C38.2 C39.2 C40.2 C41.2 C42.2 D1.1 D2.1 D3.1 D4.1 D5.1 HDR1.1 HDR1.2 HDR4.9 HDR4.10 J1.2 J1.3 J2.5 J2.10 J2.11 J3.5 J3.6 J3.7 J3.8 J3.10 J3.16 J3.17 JP1.6 JP1.21 JP1.22 JP1.23 JP1.24 JP1.25 JP1.42 LCD1.1 Q1.2 R5.2 R10.1 R17.2 R19.2 R20.2 R39.1 SW5.3 SW5.4 U1.1 U1.12 U1.19 U1.25 U1.32 U1.39 U1.50 U1.51 U1.54 U1.65 U1.72 U1.79 U1.85 U1.92 U1.103 U1.117 U1.124 U1.131 U1.137 U1.144 U1.158 U1.170 U1.177 U1.183 U1.190 U1.197 U2.2 U3.10 U7.15 U8.9 U8.25 U9.9 U9.25 U10.11 U11.11 U12.4 VR1.CCW | length 1941.4
  Top Layer w7.87: v1(2170,3313.37) v1@2170.41,3313.37
  Top Layer w19.68: v1(2475,3700) 2487.4,3712.4 C3.2@2550,3712.4
  Top Layer w39.37: 3215.74,295.28 J1.3@3335,295.28 ; 3335,185 J1.3@3335,295.28 ; 3335,415 J1.3@3335,295.28 ; 3404.28,2015 C6.2@3460,2015 ; 3413.18,417.32 J1.2@3531.85,417.32 ; 3418.1,2815 C4.2@3460,2815 ; 3445.26,852.36 C13.2@3510,852.36 ; 3446.06,295.28 J1.3@3335,295.28 ; 3457.86,2768.24 3460,2770.37 C4.2@3460,2815 ; 3460,1952.14 C6.2@3460,2015 ; 3460,2072.44 C6.2@3460,2015 ; 3460,2856.16 C4.2@3460,2815 ; 3510,810 C13.2@3510,852.36 ; 3510,917.29 C13.2@3510,852.36 ; 3521.8,2015 C6.2@3460,2015 ; 3522.19,2815 C4.2@3460,2815 ; 3531.85,298.18 J1.2@3531.85,417.32 ; 3531.85,524.18 J1.2@3531.85,417.32 ; 3575.19,852.36 C13.2@3510,852.36 ; 3648.82,417.32 J1.2@3531.85,417.32 ; 3750.74,515 C5.2@3825,515 ; 3825,440.94 C5.2@3825,515 ; 3825,568.07 C5.2@3825,515 ; 3890,515 C5.2@3825,515
  Bottom Layer w7.87: v1@2550,4775 v1(2550,4779.51)
  other v1: 2300,180 2660,349.8 2295,612.98 1714.95,675 2630,882.28 2000,1136.61 2475,1140 2235,1181.49 2365,1181.49 2125,1188.97 2800,1286.21 2140,1325 2380,1325 2600,1325 1775,1331.09 2950,1580 1975,1600 2475,1600 1175,1607.86 1175,1675.19 2950,1680 2750,1720 1560,1725 1700,1725 2896.84,1820 2890,1935 1700,1975 2750,1980 1500,2000 2940,2095 1975,2100 2475,2101.56 1500,2120 2750,2285 1765,2375 2100,2375 2664.95,2375 2350,2380 1975,2500 2225,2500 2472.27,2500 2280,2615 625,2692.51 2290,2775 2238.57,3075 2300,3280 250,3750 2300,3792.11 700,3850 2150,3900 2440.54,4775 2125,4779.51 1575,6208.25 1300,6440.14 2250,6450 2625,6450 2975,6450 2500,6675 2800,6675
GREEN0: R32.1 U1.42 | length 4467.7
  Top Layer w7.87: R32.1@2452.6,6275 2452.6,5822.4 2750,5525 2750,5125 2750,3925 2925,3750 2925,2550 3000,2475 3000,2270 2885.12,2155.12 U1.42@2811.61,2155.12
GREEN1: R35.1 U1.43 | length 4602.2
  Top Layer w7.87: R35.1@2452.6,6375 2415,6375 2390,6350 2390,5860 2725,5525 2725,5125 2725,3925 2900,3750 2900,2550 2980,2470 2980,2275 2879.8,2174.8 U1.43@2811.61,2174.8
GSM_CTS: JP1.37 U1.146 | length 273.7
  Top Layer w7.87: JP1.37@1388.19,1488.19 1488.19,1488.19 1544.88,1544.88 U1.146@1638.39,1544.88
GSM_IGT: JP1.41 U1.147 | length 298.1
  Top Layer w7.87: JP1.41@1388.19,1409.45 1440.55,1409.45 1556.3,1525.2 U1.147@1638.39,1525.2
GSM_RTS: JP1.34 U1.145 | length 257.4
  Top Layer w7.87: JP1.34@1388.19,1547.24 1497.24,1547.24 1514.57,1564.57 U1.145@1638.39,1564.57
GSM_RXD: JP1.15 U1.126 | length 1124.3
  Top Layer w7.87: JP1.15@1246.46,1507.87 1117.13,1507.87 1050,1575 1050,1850 1138.58,1938.58 U1.126@1638.39,1938.58
GSM_SYNC: JP1.13 U1.125 | length 1213.4
  Top Layer w7.87: JP1.13@1246.46,1468.5 1106.5,1468.5 1025,1550 1025,1850 1133.27,1958.27 U1.125@1638.39,1958.27
GSM_TXD: JP1.17 U1.127 | length 1035.2
  Top Layer w7.87: JP1.17@1246.46,1547.24 1127.76,1547.24 1075,1600 1075,1850 1143.9,1918.9 U1.127@1638.39,1918.9
I\N\I\T\: R24.2 U1.107 U10.8 | length 3141.6
  Top Layer w7.87: v1(1625,2550) 1550,2475 1550,2350 1587.4,2312.6 U1.107@1638.39,2312.6 ; v1(2125,850) 2250,850 2262.4,837.6 R24.2@2262.4,800 2360,800 2386.02,826.02 U10.8@2386.02,884.25
  Bottom Layer w7.87: v1(1625,2550) 1325,2250 1325,1175 1650,850 v1(2125,850)
I\N\I\T\_\P\R\: R27.2 U1.201 U11.8 | length 2316.3
  Top Layer w7.87: U11.8@2386.02,434.25 2386.02,386.02 2375,375 R27.2@2237.4,375 2237.4,397.6 2200,435 2200,510 2190,520 2135,520 2125,510 2125,240 2135,230 2265,230 2267.73,230 2280,242.27 2280,265 2340,325 2550,325 2625,400 2625,525 2800,700 2800,850 2589.17,1060.83 U1.201@2589.17,1263.39
JTAG_NEXUS_TCK: HDR4.7 RA4.3 U1.164 | length 1155
  Top Layer w7.87: HDR4.7@1725,250 1725,300 1675,350 1675,475 1700,500 RA4.3@1737,500 1775,500 1800,525 1800,625 1860.83,685.83 U1.164@1860.83,1263.39
JTAG_NEXUS_TDI: HDR4.5 RA4.1 U1.166 | length 1132.5
  Top Layer w7.87: RA4.1@1737,400 1825,400 ; HDR4.5@1825,250 1825,400 ; U1.166@1900.2,1263.39 1900.2,675.2 1850,625 1850,425 1825,400